# Altium PCB yksb.PcbDoc
Units mm, origin at the board's own origin, x right, y up, seen from the top; angles counter-clockwise.
Board outline 140 x 72.5 mm, 2 copper layers (Top Layer, Bottom Layer); 30 components, 46 nets, 163 pads, 59 vias.
Unrouted connection lines stored in the file: 3.
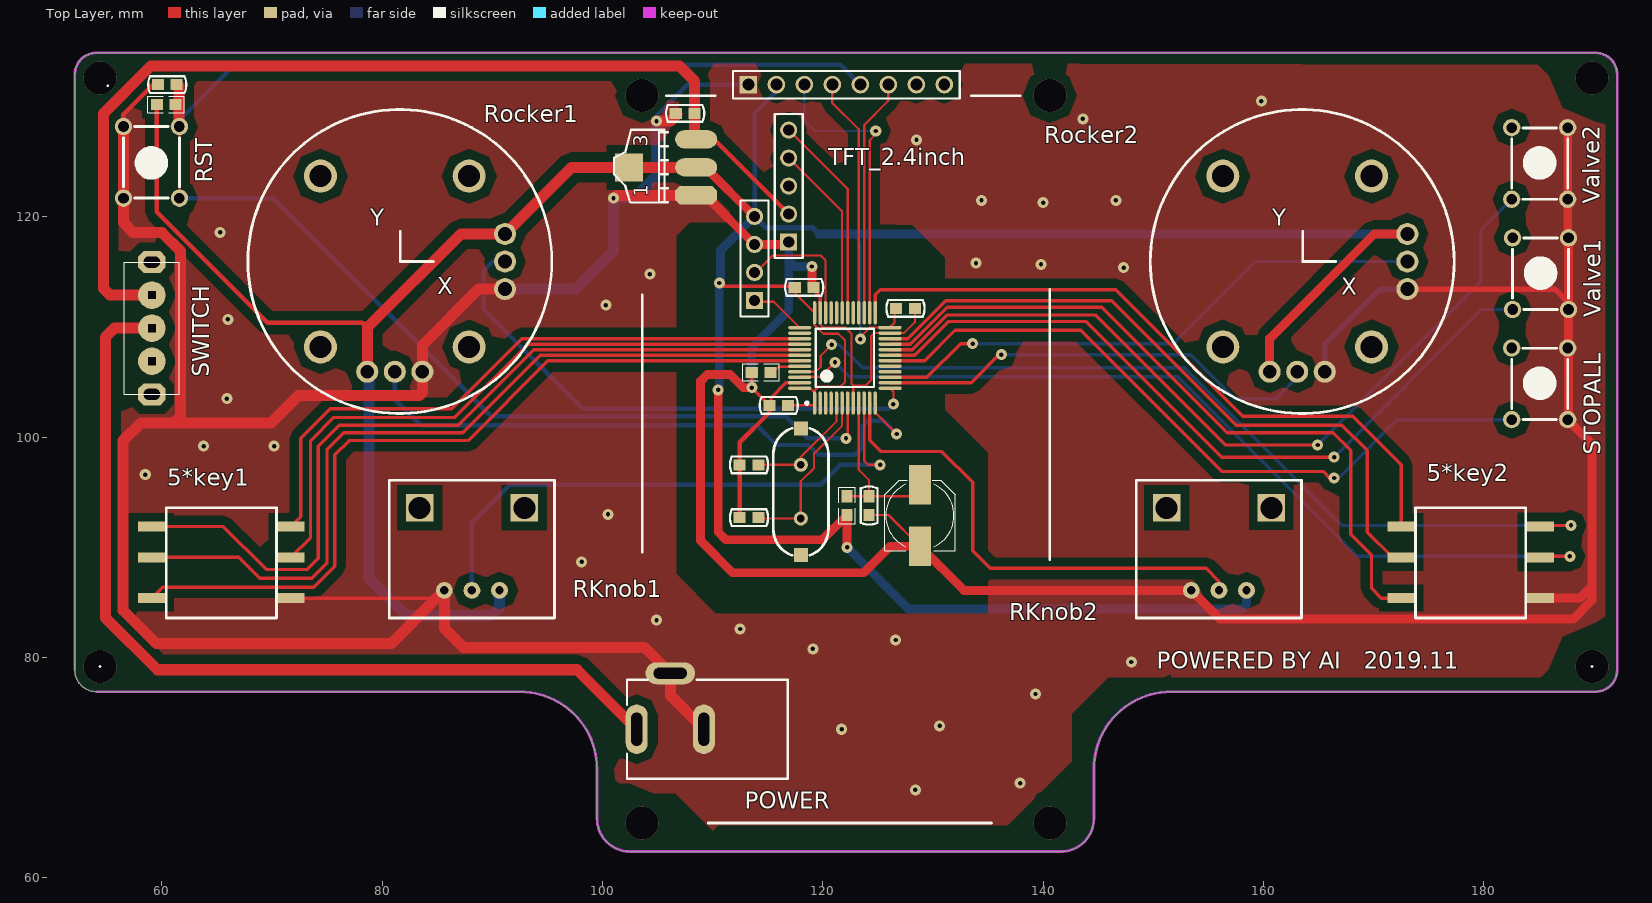
[diagram p0: Top Layer view]
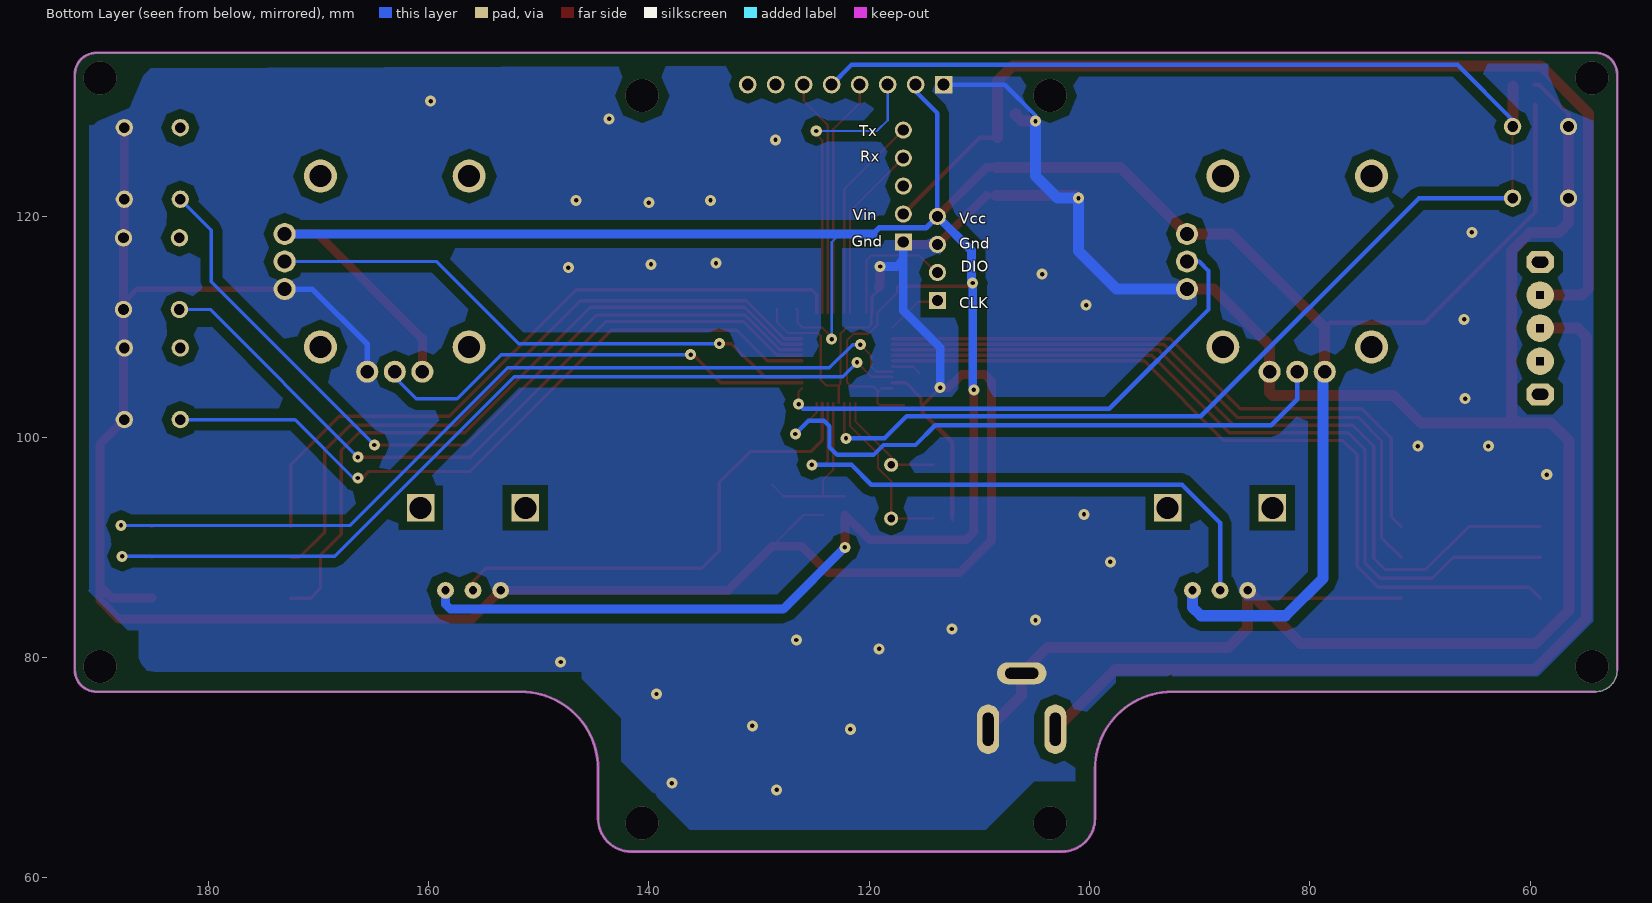
[diagram p1: Bottom Layer view, seen from below]

## Layer stack, top to bottom
Top Solder: solder mask 0.0102, Solder Resist, Dk 3.5
Top Layer: signal copper 0.0356
Dielectric 1: dielectric 0.32, FR-4, Dk 4.8
Bottom Layer: signal copper 0.0356
Bottom Solder: solder mask 0.0102, Solder Resist, Dk 3.5

## Board outline
92.5,76.9 cw(c92.5,69.9) 99.5,69.9 99.5,65.4 ccw(c102.5,65.4) 102.5,62.4 141.6,62.4 ccw(c141.6,65.4) 144.6,65.4 144.6,69.9 cw(c151.6,69.9) 151.6,76.9 190.1,76.9 ccw(c190.1,78.9) 192.1,78.9 192.1,132.9 ccw(c190.1,132.9) 190.1,134.9 54.1,134.9 ccw(c54.1,132.9) 52.1,132.9 52.1,78.9 ccw(c54.1,78.9) 54.1,76.9

## Design rules (kind name [scope] priority, off if disabled: settings)
Clearance [All] p1: gap=0.8
PlaneConnect [All] p1: planeconnectstyle=Direct reliefexpansion=0.508 reliefentries=4 reliefconductorwidth=0.254 reliefairgap=0.254
PolygonConnect [All] p1: connectstyle=Direct reliefconductorwidth=0.254 reliefentries=4 polygonreliefangle="90 Angle" airgapwidth=0.254
RoutingVias [All] p1: holewidth=0.6 width=1 viastyle="Through Hole" minholewidth=0.711 minwidth=1.27 maxholewidth=0.711 maxwidth=1.27
SolderMaskExpansion [All] p1: expansion=0.102
Width [All] p1: maxlimit=1 minlimit=0.2 preferedwidth=1
29 further rules are at their usual default settings.

## Classes and differential pairs
component class yksb: 5xkey P1

## Components (designator, comment, footprint, x,y, rotation, side; value= is the part's Value field where it differs from the comment)
5xkey "5*keysignal_output" 5xkey 178.7,88.5 r0 top
5xkey "5*keysignal_output" 5xkey 65.3,88.5 r0 top
C1 "Cap" C-RAD-0603 107.5,129.4 r180 top
C2 "Cap" C-RAD-0603 116,102.9 r180 top
C3 "Cap" C-RAD-0603 127.5,111.7 r0 top
C4 "Cap" C-RAD-0603 118.3,113.6 r0 top
C5 "Cap" C-RAD-0603 60.5,132 r0 top
C6 "Cap" C-RAD-0603 124.2,93.8 r90 top
C7 "Cap Pol" C-RB-S6 128.8,92.9 r270 top
C8 "Cap" C-RAD-0603 113.3,97.5 r180 top
C9 "Cap" C-RAD-0603 113.3,92.7 r180 top
IC1 "STM32F103C8T6" LQFP48_M 122,107.2 r90 top
J1 "CON2" DC-005 102.215,73.5 r0 top
KEY1 "KEY_M" KEY_M 61.6,128.2 r270 top
KEY2 "KEY_M" KEY_M 182.52,101.6 r90 top
KEY3 "KEY_M" KEY_M 182.6,111.6 r90 top
KEY4 "KEY_M" KEY_M 182.52,121.6 r90 top
P1 "TSW-105-05-T-S" SMTC-TSW-105-05-X-S 116.9,117.72 r90 top
P1 "PHT-108-01-L-S" SMTC-PHT-108-01-X-S 113.24,132 r0 top
P2 "TSW-104-08-G-S" SMTC-TSW-104-08-X-S 113.8,112.42 r90 top
Q1 "" dianweiqi 155.95,86.1 r0 top
Q2 "" dianweiqi 88.15,86.1 r0 top
R1 "Res1" 0603-1 60.4,130.2 r0 top
R2 "Res1" 0603-1 122.2,93.8 r90 top
R3 "Res1" 0603-1 114.4,105.9 r180 top
S5 "SW-SPDT" SWITCH_A2 59.1,106.9 r90 top
U1 "AMS1117-3.3" AMS1117 108.494,121.959 r90 top
Y1 "XTAL" XTAL_US 118,92.62 r90 top
yaogan1 "2dof" yaogan1 80.4,114.7 r0 top
yaogan2 "2dof" yaogan1 162.3,114.7 r0 top

## Footprints (in the part's own frame and the unit in brackets; to place one, negate y for a bottom-side part, rotate by r counter-clockwise, add the part's x,y. Pads: shape width x height; smd on the part's side, far side on the other; paste and mask are expansions set on the pad)
5xkey [mm] "5*keysignal_output"
  rect 2.5x0.9 smd: 1(6.4,3.4) 2(6.4,0.6) 3(6.4,-3.1) 4(-6.2,-3.1) 5(-6.2,0.6) 6(-6.2,3.4)
  silkscreen extent -4.9,-4.9 5.1,5.1, body extent -4.9,-5 5.1,5, height 9.1
0603-1 [mm] "贴片带丝印"
  rect 1.1x1 smd: 1(-0.85,0) 2(0.85,0)
  silkscreen extent -1.65,-0.76 1.65,0.76, body extent -1.14,-0.38 1.14,0.38, height 1
AMS1117 [mil]
  oct 65x150 smd: 1(0.03,-0.06)
  oval 65x150 smd: 2(100.03,-0.06) 3(200.03,-0.06)
  rect 100x100 smd: 4(100.03,239.94)
  silkscreen extent -26,100 234,293
C-RAD-0603 [mm] "贴片电容"
  rect 1.1x1 smd: 1(-0.85,0) 2(0.85,0)
  silkscreen extent -1.73,-0.76 1.73,0.76, body extent -1.14,-0.38 1.14,0.38, height 1
C-RB-S6 [mm] "贴片电解"
  rect 3.6x2 smd: 1(-2.794,0) 2(2.794,0)
  silkscreen extent -3.2,-3.2 3.2,3.2
DC-005 [mm] "DC母座5.5mm"
  oval 2x4.5 hole 1 slot 3 at 90 deg: 1(0.889,0) 2(6.985,0)
  oval 4.5x2 hole 1 slot 3 at 0 deg: 3(3.937,5.08)
  silkscreen extent 0,-4.5 14.6,4.5, body extent 0,-4.44 14.6,4.44, height 11
dianweiqi [mm]
  round 1.524 hole 0.762: 1(2.5,0) 2(0,0) 3(-2.5,0)
  rect 2.5x2.5 hole 2: ""(-4.75,7.5) ""(4.75,7.5)
  silkscreen extent -7.5,-2.5 7.5,10, body extent -4.8,-0.05 4.7,11.25, height 19.3
KEY_M [mil]
  round 62 hole 38: 1(0,0) 1(255.91,0) 2(0,-200) 2(255.91,-200)
  silkscreen extent 0,-200 255,0, body extent 9,-219 245,17, height 453
LQFP48_M [mm] "Thin QFP, 48-Leads, Body 7x7mm, Pitch 0.5mm, IPC Low Density"
  oval 2.1x0.3 smd: 1(-4.1,2.75) 2(-4.1,2.25) 3(-4.1,1.75) 4(-4.1,1.25) 5(-4.1,0.75) 6(-4.1,0.25) 7(-4.1,-0.25) 8(-4.1,-0.75) 9(-4.1,-1.25) 10(-4.1,-1.75) 11(-4.1,-2.25) 12(-4.1,-2.75) 25(4.1,-2.75) 26(4.1,-2.25) 27(4.1,-1.75) 28(4.1,-1.25) 29(4.1,-0.75) 30(4.1,-0.25) 31(4.1,0.25) 32(4.1,0.75) 33(4.1,1.25) 34(4.1,1.75) 35(4.1,2.25) 36(4.1,2.75)
  oval 0.3x2.1 smd: 13(-2.75,-4.1) 14(-2.25,-4.1) 15(-1.75,-4.1) 16(-1.25,-4.1) 17(-0.75,-4.1) 18(-0.25,-4.1) 19(0.25,-4.1) 20(0.75,-4.1) 21(1.25,-4.1) 22(1.75,-4.1) 23(2.25,-4.1) 24(2.75,-4.1) 37(2.75,4.1) 38(2.25,4.1) 39(1.75,4.1) 40(1.25,4.1) 41(0.75,4.1) 42(0.25,4.1) 43(-0.25,4.1) 44(-0.75,4.1) 45(-1.25,4.1) 46(-1.75,4.1) 47(-2.25,4.1) 48(-2.75,4.1)
  silkscreen extent -4.22,-2.65 2.65,3.57, body extent -3.5,-3.5 3.5,3.5, height 1.6
SMTC-PHT-108-01-X-S [mm] "Press Fit Socket Assembly, 1x8 Pins, Vertical, 2.54mm Pitch, Male"
  rect 1.6x1.6 hole 1.081: 1(0,0)
  round 1.6 hole 1.081: 2(2.54,0) 3(5.08,0) 4(7.62,0) 5(10.16,0) 6(12.7,0) 7(15.24,0) 8(17.78,0)
  silkscreen extent -1.4,-1.24 19.18,1.24, body extent -1.26,-1.25 19.04,1.25, height 8.38
SMTC-TSW-104-08-X-S [mm] ".025 SQ Post Terminal Strip Assembly, 1x4 Pins, Vertical, 2.54mm Pitch, Male"
  rect 1.55x1.55 hole 1.02: 1(0,0)
  round 1.55 hole 1.02: 2(2.54,0) 3(5.08,0) 4(7.62,0)
  silkscreen extent -1.46,-1.27 9.08,1.27, body extent -1.27,-1.27 8.89,1.27, height 8.58
SMTC-TSW-105-05-X-S [mm] ".025 SQ Post Terminal Strip Assembly, 1x5 Pins, Vertical, 2.54mm Pitch, Male"
  rect 1.55x1.55 hole 1.02: 1(0,0)
  round 1.55 hole 1.02: 2(2.54,0) 3(5.08,0) 4(7.62,0) 5(10.16,0)
  silkscreen extent -1.46,-1.27 11.62,1.27, body extent -1.27,-1.27 11.43,1.27, height 5.41
SWITCH_A2 [mm] "平拨开关"
  round 2.5 hole 0.7 square: 1(0,0) 2(3,0) 3(6,0)
  oct 2x2.5 hole 1 slot 1.5 at 90 deg: 4(9,0) 5(-3,0)
  silkscreen extent -3,-2.5 9,2.5
XTAL_US [mil]
  round 50 hole 28: 1(0,0) 2(192.13,0)
  rect 50x50 smd: ""(-130.32,0) ""(322.44,0)
  silkscreen extent -131,-98 323,98
yaogan1 [mm] "2dof"
  round 2 hole 1.25: 1(10.75,3.75) 2(10.75,1.25) 3(10.75,-1.25) 4(-1.75,-8.75) 5(0.75,-8.75) 6(3.25,-8.75)
  round 3 hole 2: ""(-6,-6.5) ""(-6,9) ""(7.5,-6.5) ""(7.5,9)
  silkscreen extent -12.59,-12.54 15,15.04, body extent -10.45,-9.72 11.8,12.52, height 25

## Part data
5xkey 5xkey: library part 5xkey
C1 C2 C3 C4 C5 C6 C8 C9: "无极性电容"
C7: "极性电解电容"
IC1: "单片机"
J1: "连接器"
P1: "0.025\" SQ Post Header, Through-hole, Vertical, -55 to 105 degC, 2.54 mm Pitch, 5-Pin, Male, RoHS"
P1: "Press Fit Header, Through-hole, Vertical, -55 to 125 degC, 2.54 mm Pitch, 8-Pin, Male, RoHS"
P2: "0.025\" SQ Post Header, Through-hole, Vertical, -55 to 125 degC, 2.54 mm Pitch, 4-Pin, Male, RoHS"
Q1 Q2: library part dianweiqi
R1 R2 R3: "贴片电阻"
S5: "开关"
U1: library part AMS1117
Y1: "Crystal Oscillator"
yaogan1 yaogan2: library part yaogan1

## Via types
v1: diameter 1, hole 0.4, Top Layer to Bottom Layer, 51 vias
v2: diameter 3, hole 3, Top Layer to Bottom Layer, 8 vias

## Nets (pads, with @x,y where several pads share a name; then routed paths per layer and width w, separated by ;. In a path a pad name is that pad's centre, name@x,y a point inside that pad or via, vN(x,y) a via of type N, cw(c..) or ccw(c..) an arc to the next point about the centre after c; other vN are vias at no path point)
3.3V: C2.1 C3.1 C4.1 IC1.1 IC1.24 IC1.36 IC1.48 P1.2@115.78,132 P2.4 Q1.1 Q2.1 R1.1 R2.1 U1.2 U1.4 yaogan1.1 yaogan1.4 yaogan2.1 yaogan2.4 | length 333.8
  Top Layer w0.2: C2.1 119.05,102.9 IC1.1 IC1.1@119.25,104.05 ; C4.1 117.45,113.1 IC1.36 119.25,110.198 120.048,109.4 121.4,109.4 122,108.8 122,105 121.6,104.6 119.6,104.6 119.25,104.25 IC1.1@119.25,104.05 ; IC1.48 118.85,104.45 IC1.1@119.25,104.05 ; v1(123.4,108.9) 123.4,109.1 124.25,109.95 IC1.24 126.1,110 126.5,110.4 126.5,111.55 C3.1
  Top Layer w0.3: v1(110.6,114) 110.9,113.7 117.35,113.7 C4.1
  Top Layer w0.4: R1.1 59.55,120.45 69.6,110.4 78.2,110.4 78.65,109.95
  Top Layer w0.8: U1.2 109.34,124.5 P2.4 ; v1(110.5,104.3) 110.5,91.4 111.2,90.7 119.95,90.7 R2.1 v1(122.2,90) ; yaogan2.4 160.55,108.95 170.05,118.45 yaogan2.1
  Top Layer w1: yaogan1.4 78.65,109.95 87.15,118.45 yaogan1.1 97.2,124.5 U1.4 U1.2
  Bottom Layer w0.2: 122.65,118.45 123.4,117.7 v1(123.4,108.9)
  Bottom Layer w0.4: P2.4 113.8,129.4 115.78,131.38 P1.2@115.78,132
  Bottom Layer w0.5: v1(110.5,104.3) v1@110.6,104.4 ; P2.4 114.84,119 119.1,119 119.65,118.45
  Bottom Layer w0.8: v1@110.6,104.4 v1(110.6,114) 110.7,114.1 110.7,116.94 P2.4 ; 119.65,118.45 122.65,118.45 yaogan2.1 ; v1(122.2,90) 127.8,84.4 158,84.4 158.45,84.85 Q1.1
  Bottom Layer w1: yaogan1.4 78.8,105.8 78.8,87.2 82.2,83.8 89.9,83.8 90.65,84.55 Q2.1
BLK: P1.7
BOOT0: IC1.44 R3.1 | length 2.8
  Top Layer w0.2: R3.1@115.4,105.8 116,106.4 117.85,106.4 IC1.44
CLK: IC1.26 P1.3@118.32,132 | length 26.8
  Top Layer w0.2: IC1.26 124.25,126.95 124.8,127.5 v1(124.8,127.8)
  Bottom Layer w0.2: P1.3@118.32,132 118.32,128.78 119.3,127.8 v1(124.8,127.8)
DC: IC1.27 P1.6 | length 21.6
  Top Layer w0.2: IC1.27 123.75,128.35 125.94,130.54 P1.6
GND: 5xkey.3 C1.2 C2.2 C3.2 C4.2 C5.1 C6.1 C7.2 C8.2 C9.2 IC1.8 IC1.23 IC1.35 IC1.47 J1.2 J1.3 KEY1.2 KEY2.2 KEY3.2 KEY4.2 P1.1 P2.3 Q1.3 Q2.3 R3.2 U1.1 yaogan1.3 yaogan1.6 yaogan2.3 yaogan2.6 | length 479.5
  Top Layer w0.2: C9.2@112.45,92.45 C9.2 ; R3.2 R3.2@113.7,106.05 ; C4.2@119.15,113.35 C4.2 ; IC1.35 119.8,111.25 119.8,110.214 120.064,109.95 122.05,109.95 122.6,109.4 122.6,104.85 122.75,104.7 ; IC1.8 122.75,104.7 ; C6.1 125.956,92.95 C7.2 ; C3.2 128.35,110.446 127.354,109.45 IC1.23 124.65,109.45 124.4,109.2 124.4,105.2 123.9,104.7 122.75,104.7
  Top Layer w0.3: 5xkey.3@71.7,85.4 84.95,85.4 ; R3.2 v1(113.55,104.5) C2.2 115.3,103.05 115.3,103.6 116.65,104.95 IC1.47 ; C4.2@119.15,113.35 119.75,112.75 IC1.35
  Top Layer w0.4: KEY1.2@56.52,128.2 56.52,129.32 59.2,132 C5.1 ; U1.1 U1.1@109.34,121.96 ; C9.2 C8.2 112.45,99.55 115.15,102.25 C2.2 ; P1.1@116.68,117.5 P1.1@116.9,117.72
  Top Layer w0.5: yaogan2.3 186.43,113.45 KEY3.2@187.68,112.2
  Top Layer w0.8: U1.1@109.34,121.96 P2.3 P1.1@116.68,117.5 ; v1(113.55,104.5) 112.8,104.5 111.6,105.7 109.5,105.7 108.9,105.1 108.9,90.6 111.8,87.7 123.7,87.7 126.106,90.106 C7.2 132.806,86.1 Q1.3 156.05,83.5 188.1,83.5 189.8,85.2 189.8,86.5 ; v1(119,115.5) 119,113.75 C4.2 ; 5xkey.3@185.1,85.4 188.7,85.4 189.8,86.5 ; KEY4.2@187.6,128.1 187.6,121.6 187.6,118.18 187.68,118.1 187.68,112.2 187.68,111.6 187.68,101.68 187.6,101.6 189.8,99.4 189.8,86.5
  Top Layer w1: KEY1.2@56.52,128.2 56.52,121.7 56.52,119.48 57.4,118.6 60,118.6 61.7,116.9 61.7,101.9 61.1,101.3 ; yaogan1.3 88.75,113.45 83.65,108.35 yaogan1.6 83.65,104.05 83.4,103.8 72.4,103.8 69.9,101.3 61.1,101.3 ; v1(101,121.7) 101.26,121.96 U1.1 ; v1(104.9,128.7) 106.15,128.7 106.75,129.3 C1.2 ; J1.2 106.152,76.548 J1.3 103.832,80.9 87.4,80.9 85.65,82.65 Q2.3 84.95,85.4 80.85,81.3 59.5,81.3 56.5,84.3 56.5,99.7 58.1,101.3 61.1,101.3
  Bottom Layer w0.4: v1(104.9,128.7) 104.9,129.2 107.7,132 P1.1@113.24,132
  Bottom Layer w0.5: yaogan2.6 165.55,108.45 170.55,113.45 yaogan2.3
  Bottom Layer w0.8: v1(113.55,104.5) 113.55,108.15 116.9,111.5 116.9,116.1 ; P1.1@116.9,117.72 116.9,116.1 ; v1(119,115.5) 117.5,115.5 116.9,116.1
  Bottom Layer w1: yaogan1.3 97.55,113.45 101,116.9 v1(101,121.7) 102.9,121.7 104.9,123.7 v1(104.9,128.7)
  other v1: 128.4,68 137.9,68.6 121.7,73.5 130.6,73.8 139.3,76.7 148,79.6 119.1,80.8 126.6,81.6 112.5,82.6 104.9,83.4 98.1,88.7 100.5,93 58.5,96.6 63.8,99.2 70.2,99.2 65.9,103.5 66,110.7 100.3,112 104.3,114.8 147.3,115.4 139.8,115.7 133.9,115.8 65.3,118.6 140,121.3 134.4,121.5 146.6,121.5 128.5,127 143.6,128.9 159.8,130.5
MISO: P1.8
MOSI: IC1.28 P1.4@120.86,132 | length 21.7
  Top Layer w0.2: P1.4@120.86,132 120.86,130.34 123.25,127.95 IC1.28
NRST: C5.2 IC1.7 KEY1.1 P1.5@123.4,132 R1.2 | length 148.5
  Top Layer w0.2: KEY1.1@61.6,121.7 KEY1.1@61.6,128.2 ; v1@122.25,99.55 IC1.7
  Top Layer w1: C5.2@61.55,131.9 61.55,128.25 KEY1.1@61.6,128.2
  Bottom Layer w0.4: KEY1.1@61.6,121.7 70.1,121.7 89.9,101.9 116.6,101.9 118.6,99.9 v1(122.1,99.9) ; KEY1.1@61.6,128.2 61.6,128.8 66.6,133.8 121.6,133.8 P1.5@123.4,132
PA0: IC1.10 Q2.2 | length 52.2
  Top Layer w0.2: IC1.10 123.75,97.85 124.1,97.5 v1(125.2,97.5)
  Bottom Layer w0.4: Q2.2 88.15,92.25 91.6,95.7 119.8,95.7 121.6,97.5 v1(125.2,97.5)
PA1: IC1.11 Q1.2 | length 44.8
  Top Layer w0.3: IC1.11 124.25,99.75 125.3,98.7 130.8,98.7 133.6,95.9 133.6,89.7 135.2,88.1 154.8,88.1 155.95,86.95 Q1.2
PA2: IC1.12 yaogan1.5 | length 56.6
  Top Layer w0.2: IC1.12 124.75,102.25 v1(126.7,100.3)
  Bottom Layer w0.4: yaogan1.5 81.15,103.45 83.5,101.1 114,101.1 115.8,99.3 118.7,99.3 119.6,98.4 122.9,98.4 123.6,99.1 123.6,101 124.1,101.5 125.5,101.5 v1(126.7,100.3)
PA3: IC1.13 yaogan1.2 | length 48.5
  Top Layer w0.2: IC1.13 126.4,104.15 v1(126.4,103)
  Bottom Layer w0.4: yaogan1.2 90.05,115.95 89.2,115.1 89.2,111.6 98.2,102.6 126,102.6 v1(126.4,103)
PA4: IC1.14 yaogan2.5 | length 41.3
  Top Layer w0.3: IC1.14 133.45,104.95 136.2,107.7 v1(136.2,107.5)
  Bottom Layer w0.3: v1(136.2,107.5) 153.4,107.5 157.4,103.5 161.1,103.5 163.05,105.45 yaogan2.5
PA5: IC1.15 yaogan2.2 | length 51.3
  Top Layer w0.3: IC1.15 129.45,105.45 132.5,108.5 v1(133.6,108.5)
  Bottom Layer w0.3: v1(133.6,108.5) 151.8,108.5 159.25,115.95 yaogan2.2
PA6: IC1.16
PA7: IC1.17
PA8: IC1.29
PA9: IC1.30 P1.5@116.9,127.88 | length 18.8
  Top Layer w0.2: P1.5@116.9,127.88 122.25,122.53 IC1.30
PA10: IC1.31 P1.4@116.9,125.34 | length 16
  Top Layer w0.2: P1.4@116.9,125.34 121.75,120.49 IC1.31
PA11: IC1.32
PA12: IC1.33
PA13: IC1.34 P2.2 | length 11.6
  Top Layer w0.2: P2.2@114.1,115.14 115.46,116.5 119.8,116.5 120.25,116.05 IC1.34
PA14: IC1.37 P2.1 | length 4.9
  Top Layer w0.2: P2.1@114.1,112.6 114.4,112.3 115.55,112.3 IC1.37
PA15: IC1.38
PB0: IC1.18 KEY2.1 | length 65.3
  Top Layer w0.3: IC1.18 129.243,106.95 131.993,109.7 143.4,109.7 156.2,96.9 165.4,96.9 166,96.3 v1(166.4,96.3)
  Bottom Layer w0.3: v1(166.4,96.3) 166.8,96.3 172.1,101.6 KEY2.1@182.52,101.6
PB1: IC1.19 KEY3.1 | length 68.4
  Top Layer w0.3: IC1.19 128.336,107.45 131.386,110.5 143.9,110.5 156.2,98.2 v1(166.4,98.2)
  Bottom Layer w0.3: v1(166.4,98.2) 179.8,111.6 KEY3.1@182.6,111.6
PB2: IC1.20 KEY4.1 | length 74.6
  Top Layer w0.3: IC1.20 128.129,107.95 131.279,111.1 144.7,111.1 156.5,99.3 v1(164.9,99.3)
  Bottom Layer w0.3: v1(164.9,99.3) 179.7,114.1 179.7,118.78 KEY4.1@182.52,121.6
PB3: 5xkey.1@71.7,91.9 IC1.39 | length 57.4
  Top Layer w0.3: 5xkey.1@71.7,91.9 72.6,92.8 72.6,99.9 75.3,102.6 86.3,102.6 92.65,108.95 IC1.39
PB4: 5xkey.2@71.7,89.1 IC1.40 | length 59.4
  Top Layer w0.3: 5xkey.2@71.7,89.1 73.5,90.9 73.5,99.7 75.6,101.8 86.6,101.8 93.25,108.45 IC1.40
PB5: 5xkey.6@59.1,91.9 IC1.41 | length 74.7
  Top Layer w0.3: 5xkey.6@59.1,91.9 65.6,91.9 69.5,88 73.2,88 74.2,89 74.2,99.2 76.1,101.1 86.9,101.1 93.75,107.95 IC1.41
PB6: 5xkey.5@59.1,89.1 IC1.42 | length 74
  Top Layer w0.3: 5xkey.5@59.1,89.1 67,89.1 68.9,87.2 73.6,87.2 75,88.6 75,98.9 76.5,100.4 87.3,100.4 94.35,107.45 IC1.42
PB7: 5xkey.4@59.1,85.4 IC1.43 | length 73.6
  Top Layer w0.3: 5xkey.4@59.1,85.4 60.1,86.4 73.8,86.4 75.7,88.3 75.7,98.4 77,99.7 87.8,99.7 95.05,106.95 IC1.43
PB8: 5xkey.1@185.1,91.9 IC1.45 | length 81.2
  Top Layer w0.2: IC1.45 119.35,105.95 119.8,106.4 119.8,107.4 v1(120.8,108.4)
  Top Layer w0.3: 5xkey.1@185.1,91.9 185.2,92 v1(187.9,92)
  Bottom Layer w0.3: v1(120.8,108.4) 121.5,108.4 123.6,106.3 152.8,106.3 167.1,92 v1(187.9,92)
PB9: 5xkey.2@185.1,89.1 IC1.46 | length 80.5
  Top Layer w0.2: IC1.46 117.95,105.5 119.8,105.5 v1(121.1,106.8)
  Top Layer w0.3: 5xkey.2@185.1,89.1 185.2,89.2 v1(187.8,89.2)
  Bottom Layer w0.3: v1(121.1,106.8) 122.4,105.5 152.2,105.5 168.5,89.2 v1(187.8,89.2)
PB10: 5xkey.4@172.5,85.4 IC1.21 | length 64.9
  Top Layer w0.3: IC1.21 127.922,108.45 131.272,111.8 145.3,111.8 156.7,100.4 166.3,100.4 167.9,98.8 167.9,91.2 169.8,89.3 169.8,86.3 170.7,85.4 5xkey.4@172.5,85.4
PB11: 5xkey.5@172.5,89.1 IC1.22 | length 61.8
  Top Layer w0.3: IC1.22 127.714,108.95 131.164,112.4 146.2,112.4 157.5,101.1 167.1,101.1 169.4,98.8 169.4,91.4 171.7,89.1 5xkey.5@172.5,89.1
PB12: 5xkey.6@172.5,91.9 IC1.25 | length 61.8
  Top Layer w0.3: IC1.25 124.75,112.95 125.2,113.4 146.6,113.4 158.1,101.9 168.1,101.9 172.5,97.5 5xkey.6@172.5,91.9
PC13: IC1.2
PC14: IC1.3
PC15: IC1.4
PD0: C8.1 IC1.5 Y1.2 | length 10.8
  Top Layer w0.2: C8.1 Y1.2 118,98.2 121.25,101.45 IC1.5
PD1: C9.1 IC1.6 Y1.1 | length 15.9
  Top Layer w0.2: C9.1 114.23,92.62 Y1.1 118,96 119.2,97.2 119.2,98.5 121.75,101.05 IC1.6
POWER: J1.1 S5.2 | length 82.4
  Top Layer w1: S5.2 55.7,109.9 54.9,109.1 54.9,83.6 59.6,78.9 97.704,78.9 J1.1
VDDA: C6.2 C7.1 IC1.9 R2.2 | length 15.9
  Top Layer w0.2: R2.2 C6.2 ; IC1.9 123.25,97.05 124.2,96.1 C6.2 ; C7.1 127.756,94.65 C6.2
VIN: C1.1 P1.2@116.9,120.26 S5.3 U1.3 | length 93.1
  Top Layer w0.4: U1.3@108.35,127.186 109.974,127.186 P1.2@116.9,120.26
  Top Layer w1: S5.3 55.3,112.9 54.7,113.5 54.7,129.4 59,133.7 107,133.7 108.35,132.35 C1.1 U1.3@108.35,127.186
pads on no net: P1.3@116.9,122.8 Q1. Q2. S5.1 S5.4 S5.5 Y1. yaogan1. yaogan2.
copper on no net:
  other v2: 103.6,65 140.6,65 54.4,79.2 189.8,79.2 103.6,131 140.6,131 54.4,132.6 189.8,132.6

## Polygon pours and split planes (outlines as drawn)
GND on Top Layer "AutoNaming" (solid, remove dead copper, pour order 4): 59,134.1 54,129.1 54,128.9 54,83.5 54.1,83.4 58.8,78.7 96.4,78.7 97.4,77.7 100.7,74.4 100.7,71.6 100.7,69.4 101.8,68.3 102.4,67.7 106.2,67.7 106.6,67.7 110,64.3 110.5,64.8 134.8,64.8 136.8,64.8 140.6,68.6 142.6,70.6 142.6,74.7 142.6,74.9 145.6,77.9 145.9,78.2 186.1,78.2 186.1,78.9 190.2,83 191,83.8 191,88.4 191,129.4 190.7,129.7 190.2,130.2 188.4,130.2 188.4,130.3 186.3,132.4 184.9,133.8 183.5,133.8
GND on Bottom Layer "AutoNaming" (solid, remove dead copper, pour order 8): 58.7,134 58.4,134 54.4,130 54.3,129.9 54.3,83.3 59.1,78.5 59.3,78.3 97.6,78.3 97.6,77.7 101,74.3 101.3,74 101.3,68.8 105,68.8 106.2,67.6 109.4,64.4 110,64.4 136.3,64.4 136.6,64.7 142.5,70.6 142.5,70.7 142.5,74.5 143.2,75.2 146.1,78.1 146.1,78.7 185.4,78.7 185.7,78.4 186.3,79 186.3,82.5 187.3,82.5 190.9,86.1 190.8,86.2 190.8,128.3 190.4,128.3 185.2,133.5

## Keep-outs
Keep-Out Layer:
  lines w0.254: 52.1,78.9 52.1,132.9 cw(c54.1,132.9) 54.1,134.9 190.1,134.9 cw(c190.1,132.9) 192.1,132.9 192.1,78.9 cw(c190.1,78.9) 190.1,76.9 151.6,76.9 ccw(c151.6,69.9) 144.6,69.9 144.6,65.4 cw(c141.6,65.4) 141.6,62.4 102.5,62.4 cw(c102.5,65.4) 99.5,65.4 99.5,69.9 ccw(c92.5,69.9) 92.5,76.9 54.1,76.9

## Other copper
Top Layer:
  pour cut-out: 107.9,119.5 106.7,118.3 106.7,87.6 110.3,84 135,84 135,98.6 131.1,102.5 131.1,116.3 128.1,119.3 126.7,119.3

## Silkscreen, mask and mechanical layers (free items; w line width, h text height)
Top Overlay:
  lines w0.254: 103.6,89.6 103.6,112.9 ; 105.8,131 110.2,131 ; 109.6,65 135.3,65 ; 133.5,131 137.9,131 ; 140.6,88.9 140.6,113.4 ; 55.1,131.9 55.1,131.9 ; 55.1,131.9 55.1,131.9 ; 54.4,79.2 54.4,79.2 ; 185.1,114.9 185.1,114.9 ; 189.8,79.2 189.8,79.2
  text "Rocker1" at 89.2,128.6 h1.52
  text "Rocker2" at 140.1,126.7 h1.52
  text "TFT_2.4inch" at 120.5,124.7 h1.52
  text "RST" at 64.6,123.1 h1.52 r90
  text "Valve2" at 190.5,121.2 h1.52 r90
  text "Valve1" at 190.6,110.9 h1.52 r90
  text "SWITCH" at 64.3,105.5 h1.52 r90
  text "STOPALL" at 190.6,98.4 h1.52 r90
  text "5*key2" at 174.8,96 h1.52
  text "5*key1" at 60.5,95.6 h1.52
  text "RKnob1" at 97.3,85.5 h1.52
  text "RKnob2" at 136.9,83.4 h1.52
  text "POWERED BY AI   2019.11" at 150.3,79 h1.52
  text "POWER" at 112.9,66.3 h1.52
Bottom Overlay:
  text "Tx" at 120.9,127.3 h1
  text "Rx" at 120.8,125 h1
  text "Vin" at 121.5,119.7 h1
  text "Vcc" at 111.8,119.4 h1
  text "Gnd" at 121.6,117.3 h1
  text "Gnd" at 111.8,117.1 h1
  text "DIO" at 111.7,115 h1
  text "CLK" at 111.8,111.7 h1
Mechanical 1:
  lines w0.254: 52.1,78.9 ccw(c54.1,78.9) 54.1,76.9

## Text inside footprints (layer, text, board x,y; h text height)
U1: Top Overlay "1" at 104.102,121.808 h1.27 r90; Top Overlay "3" at 104.102,126.38 h1.27 r90
yaogan1: Top Overlay "Y" at 78.9,119.2 h1.52; Top Overlay "X" at 85,113 h1.52
yaogan2: Top Overlay "Y" at 160.8,119.2 h1.52; Top Overlay "X" at 167.05,112.95 h1.52